# Altium PCB Filter_Main2.PcbDoc (part 1 of 2)
Units mm, origin at the board's own origin, x right, y up, seen from the top; angles counter-clockwise.
Board outline 175 x 90 mm, 2 copper layers (Top Layer, Bottom Layer); 103 components, 61 nets, 291 pads, 1 vias.
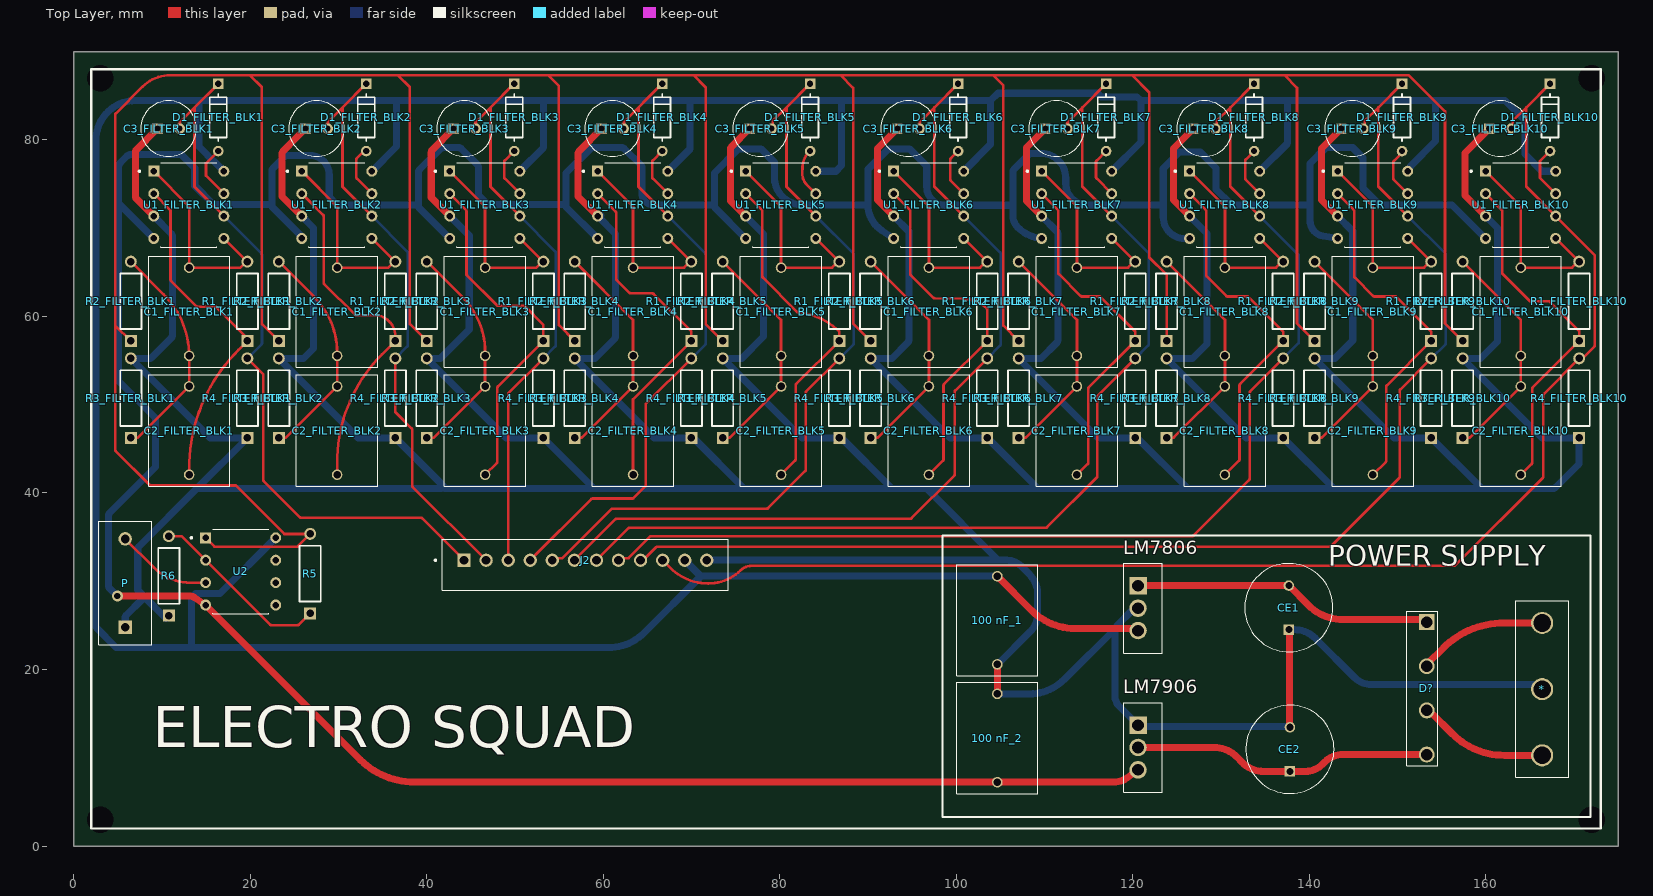
[diagram p0: Top Layer view]
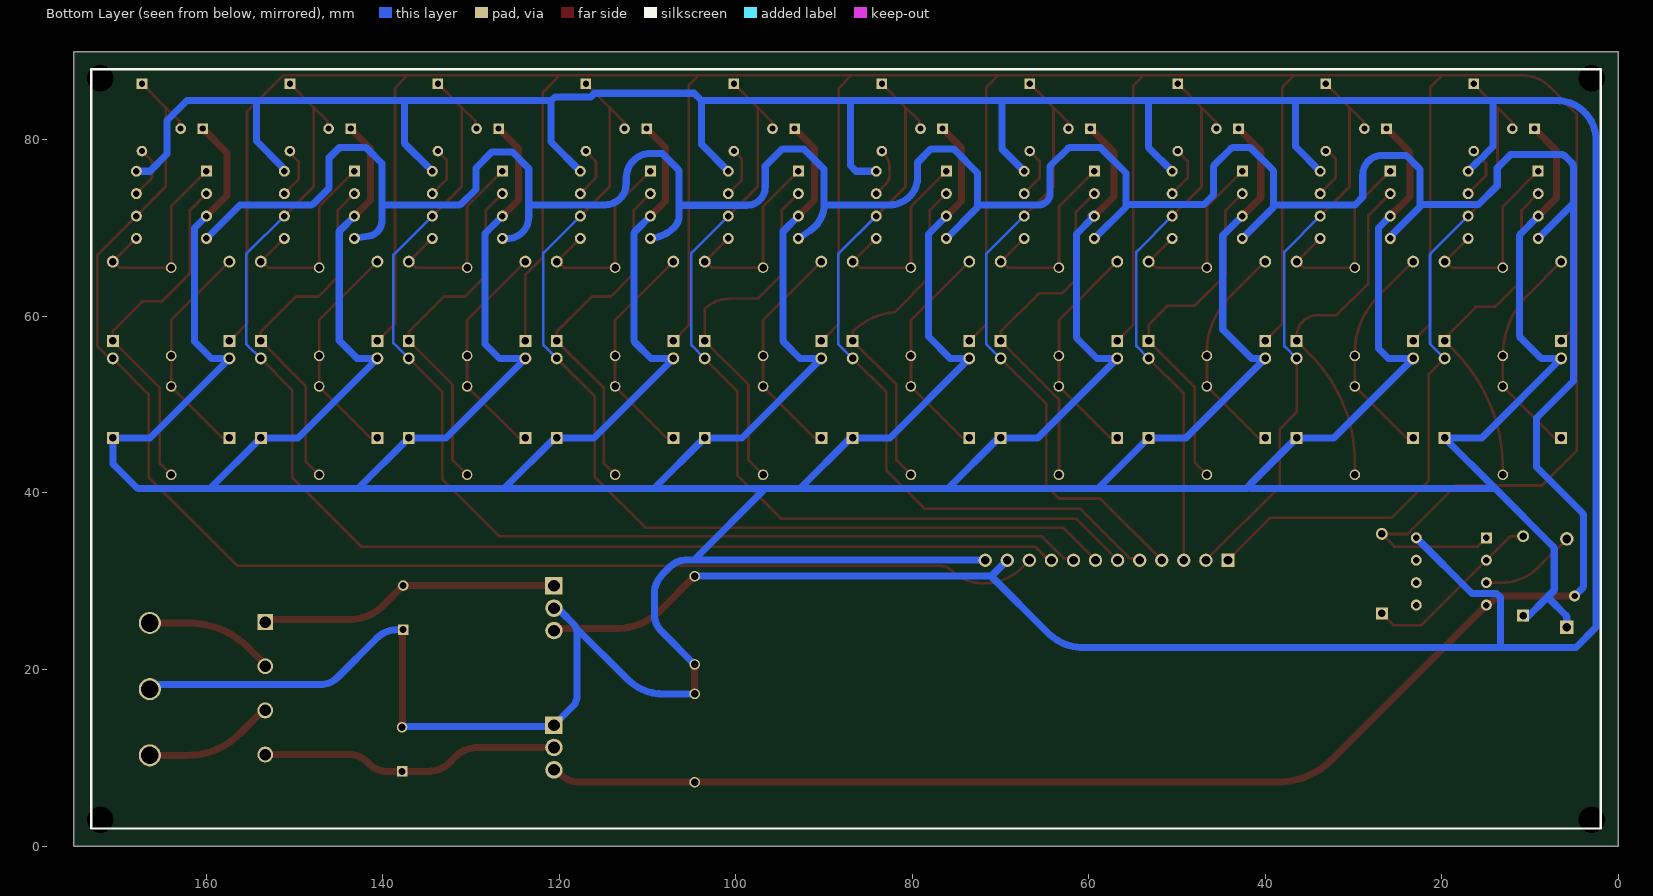
[diagram p1: Bottom Layer view, seen from below]

## Layer stack, top to bottom
Top Solder: solder mask 0.0102, Solder Resist, Dk 3.5
Top Layer: signal copper 0.0356
Dielectric 1: dielectric 0.32, FR-4, Dk 4.8
Bottom Layer: signal copper 0.0356
Bottom Solder: solder mask 0.0102, Solder Resist, Dk 3.5

## Board outline
0,0 0,90 175,90 175,0

## Design rules (kind name [scope] priority, off if disabled: settings)
BoardOutlineClearance [All] p1: gap=0.2 ignorepadtopadclearanceinfootprint=FALSE
Clearance [All] p1: gap=0.127 ignorepadtopadclearanceinfootprint=FALSE except(0.25: Arc-Hole Track-Hole SMDPad-Hole THPad-Hole Via-Hole Fill-Hole Poly-Hole Region-Hole Text-Hole)
ComponentClearance [All] p1: gap=0.127 collisioncheckmode=3 verticalgap=0.127 showdistances=TRUE
DiffPairsRouting [All] p1: maxlimit=0.254 minlimit=0.127 mostfreqgap=0.127 toplayer_minwidth=0.127 toplayer_maxwidth=25.4 toplayer_prefwidth=0.127 bottomlayer_minwidth=0.127 bottomlayer_maxwidth=25.4 bottomlayer_prefwidth=0.127 maxuncoupledlength=12.7
Height [All] p1: minheight=0 maxheight=1816.048 prefheight=12.7
HoleSize [All] p1: absolutevalues=TRUE maxlimit=6.3 minlimit=0.3 maxpercent=80.000 minpercent=20.000
HoleToHoleClearance [All] p1: gap=0.25 allowstackedmicrovias=FALSE
MinimumAnnularRing [All] p1: minimumring=0.076
MinimumSolderMaskSliver [All] p1: minsoldermaskwidth=0
PlaneClearance [All] p1: clearance=0.127
PlaneConnect PlaneConnectPowerPads [InPadClass('PowerPads')] p1: planeconnectstyle=Direct reliefexpansion=0.508 reliefentries=4 reliefconductorwidth=0.254 reliefairgap=0.254
PlaneConnect [All] p2: pad.planeconnectstyle=Relief pad.reliefexpansion=0.3 pad.reliefentries=4 pad.reliefconductorwidth=0.127 pad.reliefairgap=0.127 via.planeconnectstyle=Direct via.reliefexpansion=0.3 via.reliefentries=4 via.reliefconductorwidth=0.127 via.reliefairgap=0.127
PolygonConnect PolygonConnectPowerPads [All vs (InPadClass('PowerPads'))] p1: connectstyle=Direct reliefconductorwidth=0.254 reliefentries=4 polygonreliefangle="90 Angle" airgapwidth=0.254
PolygonConnect [All] p2: thpad.connectstyle=Relief thpad.reliefconductorwidth=0.127 thpad.reliefentries=4 thpad.polygonreliefangle="90 Angle" thpad.airgapwidth=0.127 smdpad.connectstyle=Relief smdpad.reliefconductorwidth=0.127 smdpad.reliefentries=4 smdpad.polygonreliefangle="90 Angle" smdpad.airgapwidth=0.127 via.connectstyle=Direct via.reliefconductorwidth=0.127 via.reliefentries=4 via.polygonreliefangle="90 Angle" via.airgapwidth=0.127
RoutingVias [All] p1: holewidth=0.3 width=0.6 viastyle="Through Hole" minholewidth=0.3 minwidth=0.6 maxholewidth=0.6 maxwidth=6.6
SilkToSilkClearance [All] p1: silktosilkclearance=0
SilkToSolderMaskClearance [IsPad] p1: minsilkscreentomaskgap=0.127 clearancetoexposedcopper=TRUE
SolderMaskExpansion [All] p1: expansion=0.075 istentingtop=FALSE
Width [All] p1: maxlimit=25.4 minlimit=0.127 preferedwidth=0.127 minimp=50.000000 maximp=50.000000 favimp=50.000000
20 further rules are at their usual default settings.

## Classes and differential pairs
channel class filter_block: FILTER_BLK1 FILTER_BLK2 FILTER_BLK3 FILTER_BLK4 FILTER_BLK5 FILTER_BLK6 FILTER_BLK7 FILTER_BLK8 FILTER_BLK9 FILTER_BLK10
component class Filter_Main2: "100 nF_1" "100 nF_2" * CE1 CE2 D? J2 LM7806 LM7906 P R5 R6 U2
component class FILTER_BLK10: C1_FILTER_BLK10 C2_FILTER_BLK10 C3_FILTER_BLK10 D1_FILTER_BLK10 R1_FILTER_BLK10 R2_FILTER_BLK10 R3_FILTER_BLK10 R4_FILTER_BLK10 U1_FILTER_BLK10
component class FILTER_BLK9: C1_FILTER_BLK9 C2_FILTER_BLK9 C3_FILTER_BLK9 D1_FILTER_BLK9 R1_FILTER_BLK9 R2_FILTER_BLK9 R3_FILTER_BLK9 R4_FILTER_BLK9 U1_FILTER_BLK9
component class FILTER_BLK8: C1_FILTER_BLK8 C2_FILTER_BLK8 C3_FILTER_BLK8 D1_FILTER_BLK8 R1_FILTER_BLK8 R2_FILTER_BLK8 R3_FILTER_BLK8 R4_FILTER_BLK8 U1_FILTER_BLK8
component class FILTER_BLK7: C1_FILTER_BLK7 C2_FILTER_BLK7 C3_FILTER_BLK7 D1_FILTER_BLK7 R1_FILTER_BLK7 R2_FILTER_BLK7 R3_FILTER_BLK7 R4_FILTER_BLK7 U1_FILTER_BLK7
component class FILTER_BLK6: C1_FILTER_BLK6 C2_FILTER_BLK6 C3_FILTER_BLK6 D1_FILTER_BLK6 R1_FILTER_BLK6 R2_FILTER_BLK6 R3_FILTER_BLK6 R4_FILTER_BLK6 U1_FILTER_BLK6
component class FILTER_BLK5: C1_FILTER_BLK5 C2_FILTER_BLK5 C3_FILTER_BLK5 D1_FILTER_BLK5 R1_FILTER_BLK5 R2_FILTER_BLK5 R3_FILTER_BLK5 R4_FILTER_BLK5 U1_FILTER_BLK5
component class FILTER_BLK4: C1_FILTER_BLK4 C2_FILTER_BLK4 C3_FILTER_BLK4 D1_FILTER_BLK4 R1_FILTER_BLK4 R2_FILTER_BLK4 R3_FILTER_BLK4 R4_FILTER_BLK4 U1_FILTER_BLK4
component class FILTER_BLK3: C1_FILTER_BLK3 C2_FILTER_BLK3 C3_FILTER_BLK3 D1_FILTER_BLK3 R1_FILTER_BLK3 R2_FILTER_BLK3 R3_FILTER_BLK3 R4_FILTER_BLK3 U1_FILTER_BLK3
component class FILTER_BLK2: C1_FILTER_BLK2 C2_FILTER_BLK2 C3_FILTER_BLK2 D1_FILTER_BLK2 R1_FILTER_BLK2 R2_FILTER_BLK2 R3_FILTER_BLK2 R4_FILTER_BLK2 U1_FILTER_BLK2
component class FILTER_BLK1: C1_FILTER_BLK1 C2_FILTER_BLK1 C3_FILTER_BLK1 D1_FILTER_BLK1 R1_FILTER_BLK1 R2_FILTER_BLK1 R3_FILTER_BLK1 R4_FILTER_BLK1 U1_FILTER_BLK1

## Components (designator, comment, footprint, x,y, rotation, side; value= is the part's Value field where it differs from the comment)
"100 nF_1" "100 nF" "100 nF" 104.648,20.574 r90 top
"100 nF_2" "100 nF" "100 nF" 104.648,7.239 r90 top
* "transformer_output" transformer_output 166.37,10.28 r90 top
C1_FILTER_BLK1 "ECWFD2W105Q1" CAPRR1000W60L1260T920H1390 13.081,60.532 r90 top (schematic designator C1)
C1_FILTER_BLK2 "ECWFD2W105Q1" CAPRR1000W60L1260T920H1390 29.845,60.532 r90 top (schematic designator C1)
C1_FILTER_BLK3 "ECWFD2W105Q1" CAPRR1000W60L1260T920H1390 46.609,60.532 r90 top (schematic designator C1)
C1_FILTER_BLK4 "ECWFD2W105Q1" CAPRR1000W60L1260T920H1390 63.373,60.532 r90 top (schematic designator C1)
C1_FILTER_BLK5 "ECWFD2W105Q1" CAPRR1000W60L1260T920H1390 80.137,60.532 r90 top (schematic designator C1)
C1_FILTER_BLK6 "ECWFD2W105Q1" CAPRR1000W60L1260T920H1390 96.901,60.532 r90 top (schematic designator C1)
C1_FILTER_BLK7 "ECWFD2W105Q1" CAPRR1000W60L1260T920H1390 113.665,60.532 r90 top (schematic designator C1)
C1_FILTER_BLK8 "ECWFD2W105Q1" CAPRR1000W60L1260T920H1390 130.429,60.532 r90 top (schematic designator C1)
C1_FILTER_BLK9 "ECWFD2W105Q1" CAPRR1000W60L1260T920H1390 147.193,60.532 r90 top (schematic designator C1)
C1_FILTER_BLK10 "ECWFD2W105Q1" CAPRR1000W60L1260T920H1390 163.957,60.532 r90 top (schematic designator C1)
C2_FILTER_BLK1 "ECWFD2W105Q1" CAPRR1000W60L1260T920H1390 13.081,47.07 r270 top (schematic designator C2)
C2_FILTER_BLK2 "ECWFD2W105Q1" CAPRR1000W60L1260T920H1390 29.845,47.07 r270 top (schematic designator C2)
C2_FILTER_BLK3 "ECWFD2W105Q1" CAPRR1000W60L1260T920H1390 46.609,47.07 r270 top (schematic designator C2)
C2_FILTER_BLK4 "ECWFD2W105Q1" CAPRR1000W60L1260T920H1390 63.373,47.07 r270 top (schematic designator C2)
C2_FILTER_BLK5 "ECWFD2W105Q1" CAPRR1000W60L1260T920H1390 80.137,47.07 r270 top (schematic designator C2)
C2_FILTER_BLK6 "ECWFD2W105Q1" CAPRR1000W60L1260T920H1390 96.901,47.07 r270 top (schematic designator C2)
C2_FILTER_BLK7 "ECWFD2W105Q1" CAPRR1000W60L1260T920H1390 113.665,47.07 r270 top (schematic designator C2)
C2_FILTER_BLK8 "ECWFD2W105Q1" CAPRR1000W60L1260T920H1390 130.429,47.07 r270 top (schematic designator C2)
C2_FILTER_BLK9 "ECWFD2W105Q1" CAPRR1000W60L1260T920H1390 147.193,47.07 r270 top (schematic designator C2)
C2_FILTER_BLK10 "ECWFD2W105Q1" CAPRR1000W60L1260T920H1390 163.957,47.07 r270 top (schematic designator C2)
C3_FILTER_BLK1 "CAPPRD250W50D630H1250" CAPPRD250W50D630H1250 9.505,81.28 r0 top (schematic designator C3)
C3_FILTER_BLK2 "CAPPRD250W50D630H1250" CAPPRD250W50D630H1250 26.269,81.28 r0 top (schematic designator C3)
C3_FILTER_BLK3 "CAPPRD250W50D630H1250" CAPPRD250W50D630H1250 43.033,81.28 r0 top (schematic designator C3)
C3_FILTER_BLK4 "CAPPRD250W50D630H1250" CAPPRD250W50D630H1250 59.797,81.28 r0 top (schematic designator C3)
C3_FILTER_BLK5 "CAPPRD250W50D630H1250" CAPPRD250W50D630H1250 76.561,81.28 r0 top (schematic designator C3)
C3_FILTER_BLK6 "CAPPRD250W50D630H1250" CAPPRD250W50D630H1250 93.325,81.28 r0 top (schematic designator C3)
C3_FILTER_BLK7 "CAPPRD250W50D630H1250" CAPPRD250W50D630H1250 110.089,81.28 r0 top (schematic designator C3)
C3_FILTER_BLK8 "CAPPRD250W50D630H1250" CAPPRD250W50D630H1250 126.853,81.28 r0 top (schematic designator C3)
C3_FILTER_BLK9 "CAPPRD250W50D630H1250" CAPPRD250W50D630H1250 143.617,81.28 r0 top (schematic designator C3)
C3_FILTER_BLK10 "CAPPRD250W50D630H1250" CAPPRD250W50D630H1250 160.381,81.28 r0 top (schematic designator C3)
CE1 "1000 uF" "1000 uF" 137.668,24.511 r90 top
CE2 "1000 uF" "1000 uF" 137.795,8.462 r90 top
D1_FILTER_BLK1 "1N4148" FP-017AG-MFG 16.383,82.55 r270 top (schematic designator D1)
D1_FILTER_BLK2 "1N4148" FP-017AG-MFG 33.147,82.55 r270 top (schematic designator D1)
D1_FILTER_BLK3 "1N4148" FP-017AG-MFG 49.911,82.55 r270 top (schematic designator D1)
D1_FILTER_BLK4 "1N4148" FP-017AG-MFG 66.675,82.55 r270 top (schematic designator D1)
D1_FILTER_BLK5 "1N4148" FP-017AG-MFG 83.439,82.55 r270 top (schematic designator D1)
D1_FILTER_BLK6 "1N4148" FP-017AG-MFG 100.203,82.55 r270 top (schematic designator D1)
D1_FILTER_BLK7 "1N4148" FP-017AG-MFG 116.967,82.55 r270 top (schematic designator D1)
D1_FILTER_BLK8 "1N4148" FP-017AG-MFG 133.731,82.55 r270 top (schematic designator D1)
D1_FILTER_BLK9 "1N4148" FP-017AG-MFG 150.495,82.55 r270 top (schematic designator D1)
D1_FILTER_BLK10 "1N4148" FP-017AG-MFG 167.259,82.55 r270 top (schematic designator D1)
D? "rectifier_bridge" rectifier_bridge 153.289,25.367 r270 top
J2 "B12B-XH-A(LF)(SN)" JST_B12B-XH-A(LF)(SN) 57.979,31.86 r180 top
LM7806 "LM7806" LM7806 120.587,29.483 r270 top
LM7906 "LM7906" LM7906 120.587,13.706 r270 top
P "Input_Output_Pin_Custom" Input_Output_Pin_Custom 5.842,24.798 r90 top
R1_FILTER_BLK1 "MFR-25FBF5210K" RESA60-630X240 19.685,61.722 r90 top (schematic designator R1)
R1_FILTER_BLK2 "MFR-25FBF5210K" RESA60-630X240 36.449,61.722 r90 top (schematic designator R1)
R1_FILTER_BLK3 "MFR-25FBF5210K" RESA60-630X240 53.213,61.722 r90 top (schematic designator R1)
R1_FILTER_BLK4 "MFR-25FBF5210K" RESA60-630X240 69.977,61.722 r90 top (schematic designator R1)
R1_FILTER_BLK5 "MFR-25FBF5210K" RESA60-630X240 86.741,61.722 r90 top (schematic designator R1)
R1_FILTER_BLK6 "MFR-25FBF5210K" RESA60-630X240 103.505,61.722 r90 top (schematic designator R1)
R1_FILTER_BLK7 "MFR-25FBF5210K" RESA60-630X240 120.269,61.722 r90 top (schematic designator R1)
R1_FILTER_BLK8 "MFR-25FBF5210K" RESA60-630X240 137.033,61.722 r90 top (schematic designator R1)
R1_FILTER_BLK9 "MFR-25FBF5210K" RESA60-630X240 153.797,61.722 r90 top (schematic designator R1)
R1_FILTER_BLK10 "MFR-25FBF5210K" RESA60-630X240 170.561,61.722 r90 top (schematic designator R1)
R2_FILTER_BLK1 "MFR-25FBF5210K" RESA60-630X240 6.477,61.722 r90 top (schematic designator R2)
R2_FILTER_BLK2 "MFR-25FBF5210K" RESA60-630X240 23.241,61.722 r90 top (schematic designator R2)
R2_FILTER_BLK3 "MFR-25FBF5210K" RESA60-630X240 40.005,61.722 r90 top (schematic designator R2)
R2_FILTER_BLK4 "MFR-25FBF5210K" RESA60-630X240 56.769,61.722 r90 top (schematic designator R2)
R2_FILTER_BLK5 "MFR-25FBF5210K" RESA60-630X240 73.533,61.722 r90 top (schematic designator R2)
R2_FILTER_BLK6 "MFR-25FBF5210K" RESA60-630X240 90.297,61.722 r90 top (schematic designator R2)
R2_FILTER_BLK7 "MFR-25FBF5210K" RESA60-630X240 107.061,61.722 r90 top (schematic designator R2)
R2_FILTER_BLK8 "MFR-25FBF5210K" RESA60-630X240 123.825,61.722 r90 top (schematic designator R2)
R2_FILTER_BLK9 "MFR-25FBF5210K" RESA60-630X240 140.589,61.722 r90 top (schematic designator R2)
R2_FILTER_BLK10 "MFR-25FBF5210K" RESA60-630X240 157.353,61.722 r90 top (schematic designator R2)
R3_FILTER_BLK1 "MFR-25FBF5210K" RESA60-630X240 6.477,50.745 r90 top (schematic designator R3)
R3_FILTER_BLK2 "MFR-25FBF5210K" RESA60-630X240 23.241,50.745 r90 top (schematic designator R3)
R3_FILTER_BLK3 "MFR-25FBF5210K" RESA60-630X240 40.005,50.745 r90 top (schematic designator R3)
R3_FILTER_BLK4 "MFR-25FBF5210K" RESA60-630X240 56.769,50.745 r90 top (schematic designator R3)
R3_FILTER_BLK5 "MFR-25FBF5210K" RESA60-630X240 73.533,50.745 r90 top (schematic designator R3)
R3_FILTER_BLK6 "MFR-25FBF5210K" RESA60-630X240 90.297,50.745 r90 top (schematic designator R3)
R3_FILTER_BLK7 "MFR-25FBF5210K" RESA60-630X240 107.061,50.745 r90 top (schematic designator R3)
R3_FILTER_BLK8 "MFR-25FBF5210K" RESA60-630X240 123.825,50.745 r90 top (schematic designator R3)
R3_FILTER_BLK9 "MFR-25FBF5210K" RESA60-630X240 140.589,50.745 r90 top (schematic designator R3)
R3_FILTER_BLK10 "MFR-25FBF5210K" RESA60-630X240 157.353,50.745 r90 top (schematic designator R3)
R4_FILTER_BLK1 "MFR-25FBF5210K" RESA60-630X240 19.685,50.745 r90 top (schematic designator R4)
R4_FILTER_BLK2 "MFR-25FBF5210K" RESA60-630X240 36.449,50.745 r90 top (schematic designator R4)
R4_FILTER_BLK3 "MFR-25FBF5210K" RESA60-630X240 53.213,50.745 r90 top (schematic designator R4)
R4_FILTER_BLK4 "MFR-25FBF5210K" RESA60-630X240 69.977,50.745 r90 top (schematic designator R4)
R4_FILTER_BLK5 "MFR-25FBF5210K" RESA60-630X240 86.741,50.745 r90 top (schematic designator R4)
R4_FILTER_BLK6 "MFR-25FBF5210K" RESA60-630X240 103.505,50.745 r90 top (schematic designator R4)
R4_FILTER_BLK7 "MFR-25FBF5210K" RESA60-630X240 120.269,50.745 r90 top (schematic designator R4)
R4_FILTER_BLK8 "MFR-25FBF5210K" RESA60-630X240 137.033,50.745 r90 top (schematic designator R4)
R4_FILTER_BLK9 "MFR-25FBF5210K" RESA60-630X240 153.797,50.745 r90 top (schematic designator R4)
R4_FILTER_BLK10 "MFR-25FBF5210K" RESA60-630X240 170.561,50.745 r90 top (schematic designator R4)
R5 "MFR-25FBF5210K" RESA60-630X240 26.797,30.861 r90 top
R6 "MFR-25FBF5210K" RESA60-630X240 10.795,30.607 r90 top
U1_FILTER_BLK1 "LM4562NA" DIP794W45P254L959H508Q8 13.048,72.644 r0 top (schematic designator U1)
U1_FILTER_BLK2 "LM4562NA" DIP794W45P254L959H508Q8 29.812,72.644 r0 top (schematic designator U1)
U1_FILTER_BLK3 "LM4562NA" DIP794W45P254L959H508Q8 46.576,72.644 r0 top (schematic designator U1)
U1_FILTER_BLK4 "LM4562NA" DIP794W45P254L959H508Q8 63.34,72.644 r0 top (schematic designator U1)
U1_FILTER_BLK5 "LM4562NA" DIP794W45P254L959H508Q8 80.104,72.644 r0 top (schematic designator U1)
U1_FILTER_BLK6 "LM4562NA" DIP794W45P254L959H508Q8 96.868,72.644 r0 top (schematic designator U1)
U1_FILTER_BLK7 "LM4562NA" DIP794W45P254L959H508Q8 113.632,72.644 r0 top (schematic designator U1)
U1_FILTER_BLK8 "LM4562NA" DIP794W45P254L959H508Q8 130.396,72.644 r0 top (schematic designator U1)
U1_FILTER_BLK9 "LM4562NA" DIP794W45P254L959H508Q8 147.16,72.644 r0 top (schematic designator U1)
U1_FILTER_BLK10 "LM4562NA" DIP794W45P254L959H508Q8 163.924,72.644 r0 top (schematic designator U1)
U2 "LM4562NA" DIP794W45P254L959H508Q8 18.923,31.115 r0 top

## Footprints (in the part's own frame and the unit in brackets; to place one, negate y for a bottom-side part, rotate by r counter-clockwise, add the part's x,y. Pads: shape width x height; smd on the part's side, far side on the other; paste and mask are expansions set on the pad)
"100 nF" [mm]
  round 1.2 hole 0.85: 1(0,0) 2(10,0)
  silkscreen extent -1.3,-4.6 11.3,4.6
"1000 uF" [mm]
  rect 1.2x1.2 / inner round 1.2 / far side rect 1.2x1.2 hole 0.8 mask+0.102: 1(0,0)
  round 1.2 hole 0.8 mask+0.102: 2(5,0)
  silkscreen extent -2.5,-5 7.5,5
CAPPRD250W50D630H1250 [mm]
  rect 1.208x1.208 / inner round 1.208 / far side rect 1.208x1.208 hole 0.7: 1(0,0)
  round 1.208 hole 0.7: 2(2.5,0)
  silkscreen extent -1.9,-3.15 4.4,3.15, body extent -1.9,-3.15 4.4,3.15, height 12.5
CAPRR1000W60L1260T920H1390 [mm]
  round 1.2 hole 0.85: 1(-5,0) 2(5,0)
  silkscreen extent -6.3,-4.6 6.3,4.6
DIP794W45P254L959H508Q8 [mm]
  rect 1.248x1.248 / inner round 1.248 / far side rect 1.248x1.248 hole 0.74: 1(-3.97,3.81)
  round 1.248 hole 0.74: 2(-3.97,1.27) 3(-3.97,-1.27) 4(-3.97,-3.81) 5(3.97,-3.81) 6(3.97,-1.27) 7(3.97,1.27) 8(3.97,3.81)
  silkscreen extent -5.69,-4.79 3.17,4.79, body extent -5.46,-4.63 5.46,4.63, height 5.33
FP-017AG-MFG [mm]
  rect 1.2x1.2 hole 0.7 paste-2539.97 mask+0: 1(-3.813,0)
  round 1.2 hole 0.7 paste-2539.97 mask+0: 2(3.813,0)
  silkscreen extent -2.68,-0.95 2.68,0.95, body extent -4.51,-1.05 4.51,1.05, height 0.25
Input_Output_Pin_Custom [mil]
  rect 60x60 hole 39.37: A1(0,0)
  round 60 hole 39.37: B1(393.7,0)
  silkscreen extent -79,-118 472,118
JST_B12B-XH-A(LF)(SN) [mm]
  rect 1.508x1.508 / inner round 1.508 / far side rect 1.508x1.508 hole 1: 1(13.75,-0.525)
  round 1.508 hole 1: 2(11.25,-0.525) 3(8.75,-0.525) 4(6.25,-0.525) 5(3.75,-0.525) 6(1.25,-0.525) 7(-1.25,-0.525) 8(-3.75,-0.525) 9(-6.25,-0.525) 10(-8.75,-0.525) 11(-11.25,-0.525) 12(-13.75,-0.525)
  silkscreen extent -16.2,-2.88 17.1,2.88, body extent -16.2,-2.88 16.2,2.88, height 7
LM7806 [mm]
  rect 1.98x1.98 / inner round 1.98 / far side rect 1.98x1.98 hole 1.32: 1(0,0)
  round 1.98 hole 1.32: 2(2.535,0) 3(5.07,0)
  silkscreen extent -2.55,-1.64 7.61,2.71, body extent -2.59,-1.71 7.61,2.79, height 19.22
LM7906 [mm]
  rect 1.98x1.98 / inner round 1.98 / far side rect 1.98x1.98 hole 1.32: 1(0,0)
  round 1.98 hole 1.32: 2(2.535,0) 3(5.07,0)
  silkscreen extent -2.55,-1.64 7.61,2.71, body extent -2.59,-1.71 7.61,2.79, height 19.22
rectifier_bridge [mm]
  rect 1.8x1.8 / inner round 1.8 / far side rect 1.8x1.8 hole 1.3: 1(0,0)
  round 1.8 hole 1.3: 2(5,0) 3(10,0) 4(15,0)
  silkscreen extent -1.25,-2.27 16.25,1.22, body extent 0.24,-2.29 14.74,1.21, height 12.7
RESA60-630X240 [mm] "Axial Resistor, 2-Leads, Dia 2.4mm, Body Length 6.3mm"
  rect 1.35x1.35 hole 0.85: 1(-4.5,0)
  round 1.35 hole 0.85: 2(4.5,0)
  silkscreen extent -3.15,-1.2 3.15,1.2, body extent -3.15,-1.2 3.15,1.2, height 2.4
transformer_output [mm]
  round 2.5 hole 2: GND(7.5,0) V+(0,0) V-(15,0)
  silkscreen extent -2.5,-3 17.5,3

## Part data
C1_FILTER_BLK1 C1_FILTER_BLK2 C1_FILTER_BLK3 C1_FILTER_BLK4 C1_FILTER_BLK5 C1_FILTER_BLK6 C1_FILTER_BLK7 C1_FILTER_BLK8 C1_FILTER_BLK9 C1_FILTER_BLK10 C2_FILTER_BLK1 C2_FILTER_BLK2 C2_FILTER_BLK3 C2_FILTER_BLK4 C2_FILTER_BLK5 C2_FILTER_BLK6 C2_FILTER_BLK7 C2_FILTER_BLK8 C2_FILTER_BLK9 C2_FILTER_BLK10: "Capacitor film", Package=None, Availability=Unavailable, MP=ECWFD2W105Q1, Price=None
C3_FILTER_BLK1 C3_FILTER_BLK2 C3_FILTER_BLK3 C3_FILTER_BLK4 C3_FILTER_BLK5 C3_FILTER_BLK6 C3_FILTER_BLK7 C3_FILTER_BLK8 C3_FILTER_BLK9 C3_FILTER_BLK10: "Capacitor Electrolyte"
D1_FILTER_BLK1 D1_FILTER_BLK2 D1_FILTER_BLK3 D1_FILTER_BLK4 D1_FILTER_BLK5 D1_FILTER_BLK6 D1_FILTER_BLK7 D1_FILTER_BLK8 D1_FILTER_BLK9 D1_FILTER_BLK10: library part CMP-07163-000046-1, "DIODE GEN PURP 100V 200MA DO35", Average Rectified Current=200mA, Capacitance=4pF, Case/Package=DO-35, Current=4A, Forward Current=300mA, Forward Voltage=1V, Max Forward Surge Current (Ifsm)=1A, Max Operating Temperature=175°C, Max Power Dissipation=500mW, Max Repetitive Reverse Voltage (Vrrm)=100V, Max Reverse Current=5uA, Min Operating Temperature=-65°C, Package Quantity=2000, Contact Plating=Tin, Current Rating=200mA, Diameter=1.91mm, Element Configuration=Single, Height=4.56mm, Lead Free="Lead Free", Length=4.56mm, Max Reverse Voltage (DC)=100V, Max Surge Current=4A, Mount="Through Hole", Number of Pins=2, Output Current=200mA, Outside Diameter=1.85mm, Packaging=Bulk, Peak Non-Repetitive Surge Current=4A, Polarity=Standard, Power Dissipation=500mW, Radiation Hardening=No, REACH SVHC="No SVHC", Recovery Time=4ns, Reverse Recovery Time=4ns, Reverse Voltage=100V, Series=-, Voltage=100V, Voltage Rating (DC)=100V, Weight=0.01lb, Width=1.91mm
J2: "Connector Header Through Hole 12 position 0.098 (2.50mm)", Package=None, Check_prices=https://www.snapeda.com/parts/B12B-XH-A(LF)(SN)/JST+Sales+America+Inc./view-part/?ref=eda, MF="JST Sales", MP=B12B-XH-A(LF)(SN), SnapEDA_Link=https://www.snapeda.com/parts/B12B-XH-A(LF)(SN)/JST+Sales+America+Inc./view-part/?ref=snap
R1_FILTER_BLK1 R1_FILTER_BLK2 R1_FILTER_BLK3 R1_FILTER_BLK4 R1_FILTER_BLK5 R1_FILTER_BLK6 R1_FILTER_BLK7 R1_FILTER_BLK8 R1_FILTER_BLK9 R1_FILTER_BLK10 R2_FILTER_BLK1 R2_FILTER_BLK2 R2_FILTER_BLK3 R2_FILTER_BLK4 R2_FILTER_BLK5 R2_FILTER_BLK6 R2_FILTER_BLK7 R2_FILTER_BLK8 R2_FILTER_BLK9 R2_FILTER_BLK10 R3_FILTER_BLK1 R3_FILTER_BLK2 R3_FILTER_BLK3 R3_FILTER_BLK4 R3_FILTER_BLK5 R3_FILTER_BLK6 R3_FILTER_BLK7 R3_FILTER_BLK8 R3_FILTER_BLK9 R3_FILTER_BLK10 R4_FILTER_BLK1 R4_FILTER_BLK2 R4_FILTER_BLK3 R4_FILTER_BLK4 R4_FILTER_BLK5 R4_FILTER_BLK6 R4_FILTER_BLK7 R4_FILTER_BLK8 R4_FILTER_BLK9 R4_FILTER_BLK10 R5 R6: library part CMP-1659-00074-2, "Axial Resistor, 10 KOhm, +/- 1%, 0.25 W, -55 to 155 degC, 2-Pin THD, RoHS, Bulk", Case\/Package=Axial, Manufacturer=Yageo, Max Operating Temperature=155degC, Max Power Dissipation=250mW, Min Operating Temperature=-55degC, Package Description="2-Pin Axial Lead, Dia 2.4 mm, Body Length 6.3 mm", Package Quantity=200, Package Reference=MFR-25, Resistance=10KOhm, Temperature Coefficient=100ppm\/degreesC, Tolerance=1%, Voltage Rating=250V, Voltage Rating (DC)=200V, Composition=MetalFilm, Datasheet URL=http://www.yageo.com/documents/recent/Yageo%20LR_MFR_2013.pdf, Datasheet Version=04/2013, Lead Free=LeadFree, Length=0.248inch, Manufacturer URL=http://www.yageo.com/, Military Standard=Not, Mount=ThroughHole, Mounting Technology=ThroughHole, Number of Terminations=2, Packaging=Bulk, Power Rating=250mW, RoHSCompliant=True, Termination=Axial
U1_FILTER_BLK1 U1_FILTER_BLK2 U1_FILTER_BLK3 U1_FILTER_BLK4 U1_FILTER_BLK5 U1_FILTER_BLK6 U1_FILTER_BLK7 U1_FILTER_BLK8 U1_FILTER_BLK9 U1_FILTER_BLK10 U2: "LM4562 2 - Dual Channels per IC Audio Amplifier Evaluation Board", Package="DIP-8 Texas Instruments", Check_prices=https://www.snapeda.com/parts/LM4562NA/Texas+Instruments/view-part/?ref=eda, MF="Texas Instruments", MP=LM4562NA, SnapEDA_Link=https://www.snapeda.com/parts/LM4562NA/Texas+Instruments/view-part/?ref=snap

## Free pads (board coordinates)
  round 1.524 hole 3 unplated: 2(3,3) 2(3,87) 2(172,3) 2(172,87)

## Via types
v1: diameter 1.27, hole 0.711, Top Layer to Bottom Layer, 1 vias

## Nets (pads, with @x,y where several pads share a name; then routed paths per layer and width w, separated by ;. In a path a pad name is that pad's centre, name@x,y a point inside that pad or via, vN(x,y) a via of type N, cw(c..) or ccw(c..) an arc to the next point about the centre after c; other vN are vias at no path point)
AMP_IN: R2_FILTER_BLK1.1 R2_FILTER_BLK2.1 R2_FILTER_BLK3.1 R2_FILTER_BLK4.1 R2_FILTER_BLK5.1 R2_FILTER_BLK6.1 R2_FILTER_BLK7.1 R2_FILTER_BLK8.1 R2_FILTER_BLK9.1 R2_FILTER_BLK10.1 R5.2 U2.1 | length 512.3
  Top Layer w0.3: R2_FILTER_BLK1.1@6.477,57.222 4.699,59 ; U2.1@14.953,34.925 15.958,33.92 25.356,33.92 R5.2@26.797,35.361 23.878,35.361 18.387,40.852 8.758,40.852 cw(c8.758,41.047) 8.621,40.909 4.756,44.774 cw(c4.893,44.912) 4.699,44.912 4.699,59 ; R2_FILTER_BLK2.1@23.241,57.222 21.316,59.147 21.316,85.967 19.939,87.344 ; R2_FILTER_BLK3.1@40.005,57.222 38.08,59.147 38.08,85.967 36.703,87.344 ; R2_FILTER_BLK4.1@56.769,57.222 54.971,59.02 54.971,86.094 53.721,87.344 ; R2_FILTER_BLK5.1@73.533,57.222 71.608,59.147 71.608,85.967 70.231,87.344 ; R2_FILTER_BLK6.1@90.297,57.222 88.308,59.211 88.308,85.904 86.868,87.344 ; R2_FILTER_BLK7.1@107.061,57.222 105.326,58.957 105.326,86.158 104.14,87.344 ; R2_FILTER_BLK8.1@123.825,57.222 123.825,64.729 121.856,66.697 121.856,85.376 119.888,87.344 ; R2_FILTER_BLK9.1@140.589,57.222 138.6,59.211 138.6,85.904 137.16,87.344 ; R2_FILTER_BLK10.1@157.353,57.222 155.361,59.214 155.361,83.236 151.253,87.344 137.16,87.344 ; 4.699,59 4.699,82.807 cw(c4.999,82.807) 4.787,83.019 7.796,86.028 cw(c10.987,82.817) 10.987,87.344 19.939,87.344 ; 19.939,87.344 36.703,87.344 ; 36.703,87.344 53.721,87.344 ; 53.721,87.344 70.231,87.344 ; 70.231,87.344 86.868,87.344 ; 86.868,87.344 104.14,87.344 ; 104.14,87.344 119.888,87.344 ; 119.888,87.344 137.16,87.344
AMP_IN_FILTER_BLK10: 
GND: "100 nF_1.1" "100 nF_2.2" *.GND C3_FILTER_BLK1.1 C3_FILTER_BLK2.1 C3_FILTER_BLK3.1 C3_FILTER_BLK4.1 C3_FILTER_BLK5.1 C3_FILTER_BLK6.1 C3_FILTER_BLK7.1 C3_FILTER_BLK8.1 C3_FILTER_BLK9.1 C3_FILTER_BLK10.1 CE1.1 CE2.2 J2.12 LM7806.2 LM7906.1 P.A1 R3_FILTER_BLK1.2 R3_FILTER_BLK2.2 R3_FILTER_BLK3.2 R3_FILTER_BLK4.2 R3_FILTER_BLK5.2 R3_FILTER_BLK6.2 R3_FILTER_BLK7.2 R3_FILTER_BLK8.2 R3_FILTER_BLK9.2 R3_FILTER_BLK10.2 R4_FILTER_BLK1.1 R4_FILTER_BLK2.1 R4_FILTER_BLK3.1 R4_FILTER_BLK4.1 R4_FILTER_BLK5.1 R4_FILTER_BLK6.1 R4_FILTER_BLK7.1 R4_FILTER_BLK8.1 R4_FILTER_BLK9.1 R4_FILTER_BLK10.1 R6.1 U1_FILTER_BLK1.3 U1_FILTER_BLK2.3 U1_FILTER_BLK3.3 U1_FILTER_BLK4.3 U1_FILTER_BLK5.3 U1_FILTER_BLK6.3 U1_FILTER_BLK7.3 U1_FILTER_BLK8.3 U1_FILTER_BLK9.3 U1_FILTER_BLK10.3 | length 900
  Top Layer w0.8: U1_FILTER_BLK1.3@9.078,71.374 6.985,73.467 6.985,78.76 C3_FILTER_BLK1.1@9.505,81.28 ; 23.752,78.763 ccw(c24.066,78.449) 23.622,78.449 23.622,73.594 U1_FILTER_BLK2.3@25.842,71.374 ; 23.753,78.764 25.152,80.163 C3_FILTER_BLK2.1@26.269,81.28 ; U1_FILTER_BLK3.3@42.606,71.374 40.513,73.467 40.513,78.576 cw(c40.957,78.576) 40.643,78.89 C3_FILTER_BLK3.1@43.033,81.28 ; U1_FILTER_BLK4.3@59.37,71.374 57.15,73.594 57.15,78.449 cw(c57.594,78.449) 57.28,78.763 C3_FILTER_BLK4.1@59.797,81.28 ; U1_FILTER_BLK5.3@76.134,71.374 74.422,73.086 74.422,78.957 cw(c74.866,78.957) 74.552,79.271 C3_FILTER_BLK5.1@76.561,81.28 ; U1_FILTER_BLK6.3@92.898,71.374 91.059,73.213 91.059,79.014 C3_FILTER_BLK6.1@93.325,81.28 ; 104.648,17.239 104.648,20.574 ; U1_FILTER_BLK7.3@109.662,71.374 107.95,73.086 107.95,79.141 C3_FILTER_BLK7.1@110.089,81.28 ; U1_FILTER_BLK8.3@126.426,71.374 124.587,73.213 124.587,79.014 C3_FILTER_BLK8.1@126.853,81.28 ; CE1.1@137.668,24.511 137.731,24.447 137.731,13.525 CE2.2@137.795,13.462 ; U1_FILTER_BLK9.3@143.19,71.374 141.351,73.213 141.351,79.014 C3_FILTER_BLK9.1@143.617,81.28 ; U1_FILTER_BLK10.3@159.954,71.374 157.607,73.721 157.607,78.506 C3_FILTER_BLK10.1@160.381,81.28
  Bottom Layer w0.8: P.A1@5.842,24.798 5.842,25.851 cw(c6.286,25.851) 5.972,26.165 7.715,27.908 ccw(c7.4,28.222) 7.742,27.937 8.001,28.249 ; U1_FILTER_BLK1.3@9.078,71.374 11.046,69.406 cw(c10.732,69.092) 11.176,69.092 11.176,57.842 cw(c10.732,57.842) 11.046,57.528 8.893,55.375 cw(c8.579,55.689) 8.579,55.245 R3_FILTER_BLK1.2@6.477,55.245 15.477,46.245 R4_FILTER_BLK1.1@19.685,46.245 13.949,40.509 ; R6.1@10.469,25.781 8.001,28.249 ; U1_FILTER_BLK2.3@26.042,71.374 U1_FILTER_BLK2.3@25.842,71.374 27.178,70.038 27.178,56.388 26.035,55.245 R3_FILTER_BLK2.2@23.241,55.245 32.241,46.245 R4_FILTER_BLK2.1@36.449,46.245 36.724,45.97 41.426,41.268 41.912,40.782 ; 41.912,40.781 cw(c41.502,40.953) 41.504,40.509 13.949,40.509 ; 42.041,40.509 58.949,40.509 ; U1_FILTER_BLK3.3@42.606,71.374 44.819,69.161 44.819,58.535 41.529,55.245 R3_FILTER_BLK3.2@40.005,55.245 49.005,46.245 R4_FILTER_BLK3.1@53.213,46.245 58.949,40.509 ; 58.95,40.508 58.949,40.509 ; U1_FILTER_BLK4.3@59.753,71.46 59.456,71.46 U1_FILTER_BLK4.3@59.37,71.374 61.393,69.351 61.393,67.616 61.393,57.767 cw(c60.949,57.767) 61.263,57.453 59.055,55.245 R3_FILTER_BLK4.2@56.769,55.245 65.769,46.245 R4_FILTER_BLK4.1@69.977,46.245 70.252,46.207 75.95,40.509 ; J2.12@71.729,32.385 104.683,32.385 105.71,32.385 cw(c105.71,30.044) 107.367,31.698 107.37,31.695 108.258,30.807 108.26,30.805 cw(c105.963,28.496) 109.22,28.494 109.22,26.297 cw(c106.441,26.297) 108.405,24.331 104.648,20.574 ; U1_FILTER_BLK5.3@76.134,71.374 78.166,69.342 78.166,57.719 75.692,55.245 R3_FILTER_BLK5.2@73.533,55.245 82.533,46.245 R4_FILTER_BLK5.1@86.741,46.245 87.016,46.207 92.715,40.508 ; 81.004,40.508 92.715,40.508 ; 81.005,40.509 75.95,40.509 ; U1_FILTER_BLK6.3@92.898,71.374 94.615,69.657 94.615,57.334 cw(c94.171,57.334) 94.485,57.02 92.71,55.245 R3_FILTER_BLK6.2@90.297,55.245 99.297,46.245 R4_FILTER_BLK6.1@103.505,46.245 103.78,45.97 108.965,40.785 cw(c108.65,40.471) 109.093,40.508 126.243,40.508 ; 104.648,17.239 108.262,17.239 ccw(c108.264,22.839) 112.224,18.879 ccw(c108.264,22.839) 112.226,18.881 118.127,24.782 ; 104.683,32.477 96.652,40.508 ; 108.965,40.508 96.652,40.508 ; U1_FILTER_BLK7.3@109.662,71.374 111.376,69.66 cw(c111.062,69.346) 111.506,69.346 111.506,57.334 cw(c111.062,57.334) 111.376,57.02 109.601,55.245 R3_FILTER_BLK7.2@107.061,55.245 116.061,46.245 R4_FILTER_BLK7.1@120.269,46.245 120.544,46.207 126.243,40.508 ; 118.047,24.589 117.983,24.434 117.983,16.641 118.217,16.076 ; 118.16,24.862 118.217,24.999 119.932,26.714 120.497,26.948 LM7806.2@120.587,26.948 ; 118.217,16.076 LM7906.1@120.587,13.706 120.754,13.539 137.718,13.539 CE2.2@137.795,13.462 ; U1_FILTER_BLK8.3@126.426,71.374 128.397,69.403 128.397,56.896 126.746,55.245 R3_FILTER_BLK8.2@123.825,55.245 132.825,46.245 R4_FILTER_BLK8.1@137.033,46.245 142.769,40.509 ; CE1.1@137.668,24.511 137.868,24.511 138.316,24.511 cw(c138.316,21.169) 140.674,23.537 140.68,23.531 145.137,19.074 ccw(c147.037,20.978) 147.039,18.288 165.531,18.288 cw(c165.531,17.488) 166.096,18.054 *.GND@166.37,17.78 ; U1_FILTER_BLK9.3@143.19,71.374 144.907,69.657 144.907,57.277 142.875,55.245 R3_FILTER_BLK9.2@140.589,55.245 149.589,46.245 R4_FILTER_BLK9.1@153.797,46.245 154.072,45.97 159.257,40.785 cw(c158.942,40.471) 159.385,40.509 167.579,40.509 ccw(c167.579,40.953) 167.893,40.639 170.431,43.177 ccw(c170.117,43.491) 170.561,43.491 R4_FILTER_BLK10.1@170.561,46.245 166.353,46.245 R3_FILTER_BLK10.2@157.353,55.245 159.385,55.245 161.29,57.15 161.29,70.038 U1_FILTER_BLK10.3@159.954,71.374 U1_FILTER_BLK10.3@160.154,71.374 ; 159.257,40.509 142.769,40.509 ; 8.001,28.249 7.264,28.986 7.264,33.64 cw(c7.708,33.64) 7.394,33.953 13.949,40.509 ; 58.949,40.509 75.95,40.509 ; 92.715,40.508 96.652,40.508 ; 126.243,40.508 142.77,40.508 142.769,40.509
Net*_V+: *.V+ D?.3 | length 14.8
  Top Layer w0.8: D?.3@153.289,15.365 D?.3@153.289,15.367 153.338,15.359 cw(c153.209,14.569) 153.774,15.136 156.184,12.726 ccw(c162.087,18.626) 162.089,10.28 *.V+@166.37,10.28
Net*_V-: *.V- D?.2 | length 14.8
  Top Layer w0.8: D?.2@153.289,20.367 cw(c154.077,20.231) 153.511,20.796 155.117,22.402 cw(c162.052,15.485) 162.054,25.28 *.V-@166.37,25.28
NetC1_FILTER_BLK1_1: C1_FILTER_BLK1.1 C2_FILTER_BLK1.1 R2_FILTER_BLK1.2 R3_FILTER_BLK1.1 | length 25.5
  Top Layer w0.3: R3_FILTER_BLK1.1@6.477,46.245 7.002,46.261 7.204,46.267 ccw(c7.197,46.461) 7.334,46.323 C2_FILTER_BLK1.1@13.081,52.07 C1_FILTER_BLK1.1@13.081,55.532 ccw(c3.217,55.532) 10.191,62.508 R2_FILTER_BLK1.2@6.477,66.222
NetC1_FILTER_BLK1_2: C1_FILTER_BLK1.2 R1_FILTER_BLK1.2 U1_FILTER_BLK1.1 U1_FILTER_BLK1.5 | length 23.2
  Top Layer w0.3: U1_FILTER_BLK1.1@9.078,76.454 13.081,72.451 C1_FILTER_BLK1.2@13.081,65.532 18.882,65.532 19.572,66.222 R1_FILTER_BLK1.2@19.685,66.222 19.658,66.222 17.046,68.834 U1_FILTER_BLK1.5@17.018,68.834
NetC1_FILTER_BLK2_1: C1_FILTER_BLK2.1 C2_FILTER_BLK2.1 R2_FILTER_BLK2.2 R3_FILTER_BLK2.1 | length 25.5
  Top Layer w0.3: R3_FILTER_BLK2.1@23.241,46.245 23.939,46.245 ccw(c23.939,46.439) 24.077,46.302 C2_FILTER_BLK2.1@29.845,52.07 29.845,55.884 ccw(c20.83,55.884) 27.207,62.256 27.203,62.26 R2_FILTER_BLK2.2@23.241,66.222
NetC1_FILTER_BLK2_2: C1_FILTER_BLK2.2 R1_FILTER_BLK2.2 U1_FILTER_BLK2.1 U1_FILTER_BLK2.5 | length 23.2
  Top Layer w0.3: U1_FILTER_BLK2.1@25.842,76.454 29.845,72.451 C1_FILTER_BLK2.2@29.845,65.532 35.646,65.532 36.336,66.222 R1_FILTER_BLK2.2@36.449,66.222 36.422,66.222 33.81,68.834 U1_FILTER_BLK2.5@33.782,68.834